# Altium PCB MAGIsCM4Core-AutoRoute.PcbDoc
Units mil, origin at the board's own origin, x right, y up, seen from the top; angles counter-clockwise.
Board outline 6000 x 4000 mil, 4 copper layers (Component Side, Ground Plane, Power Plane, Solder Side), stack 33.234 mil thick; 33 components, 65 nets, 187 pads, 103 vias.
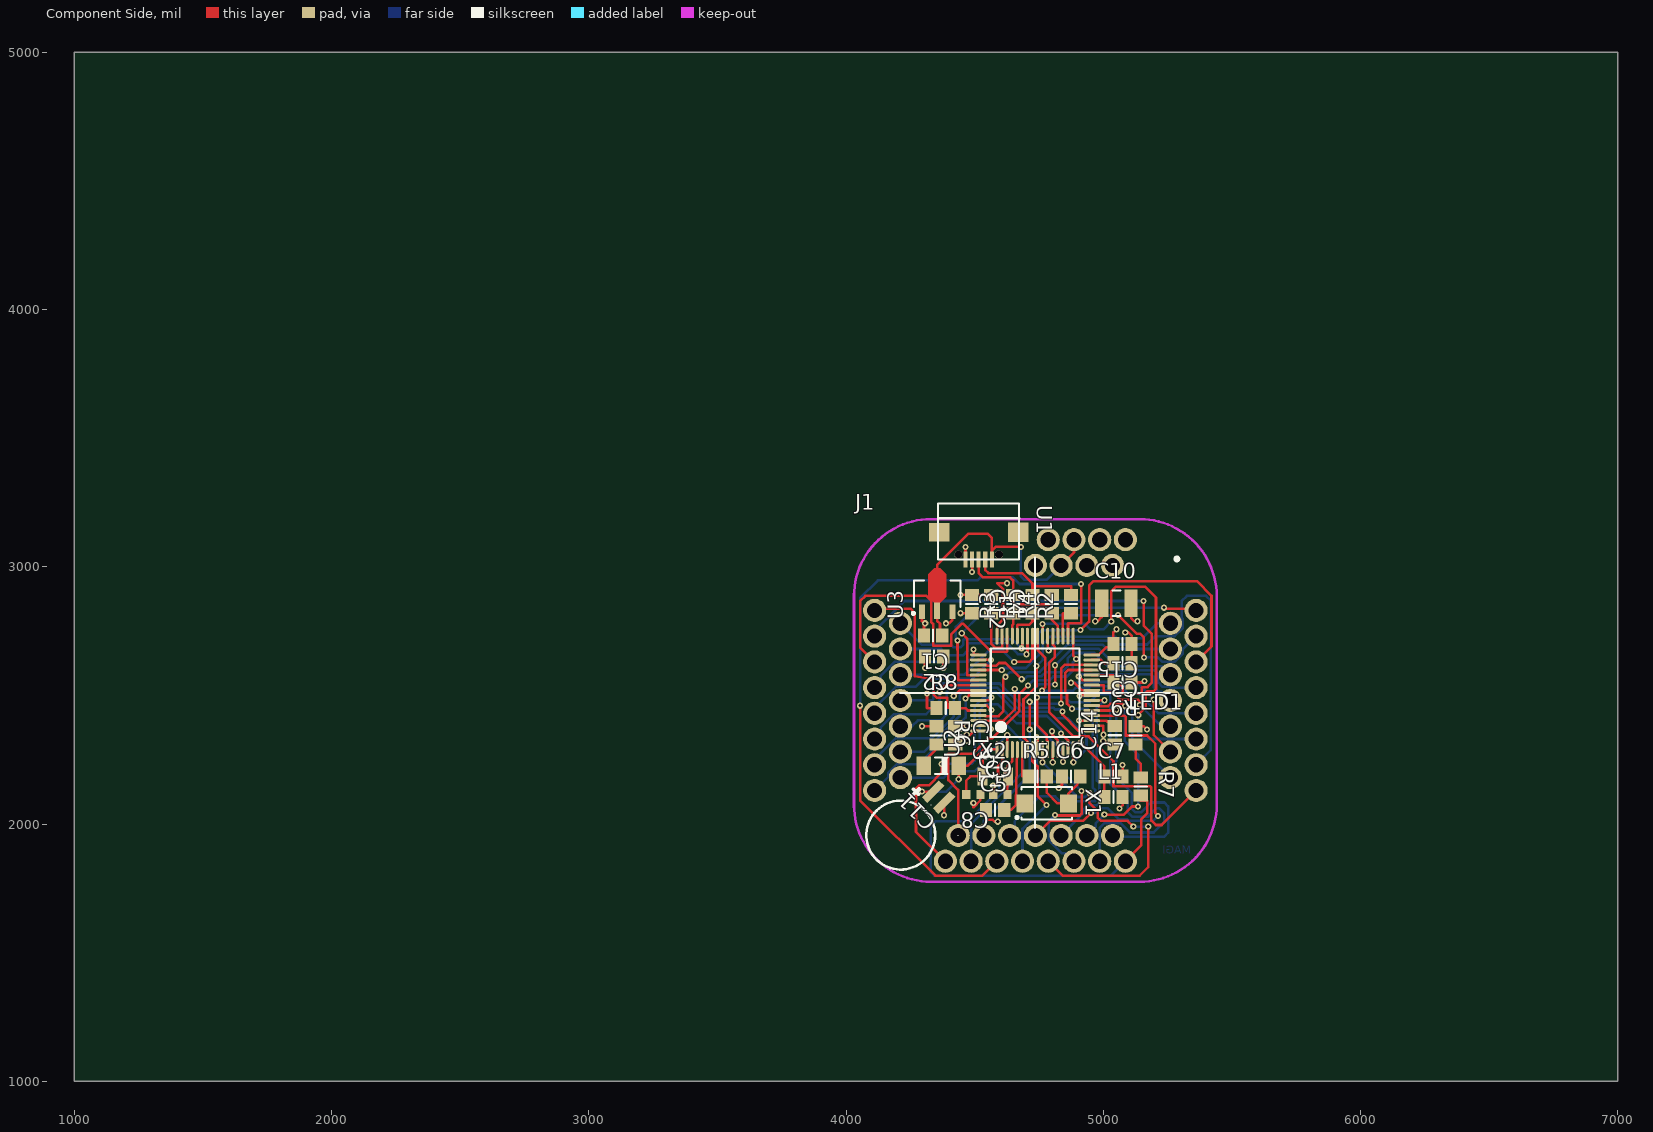
[diagram p0: Component Side view]
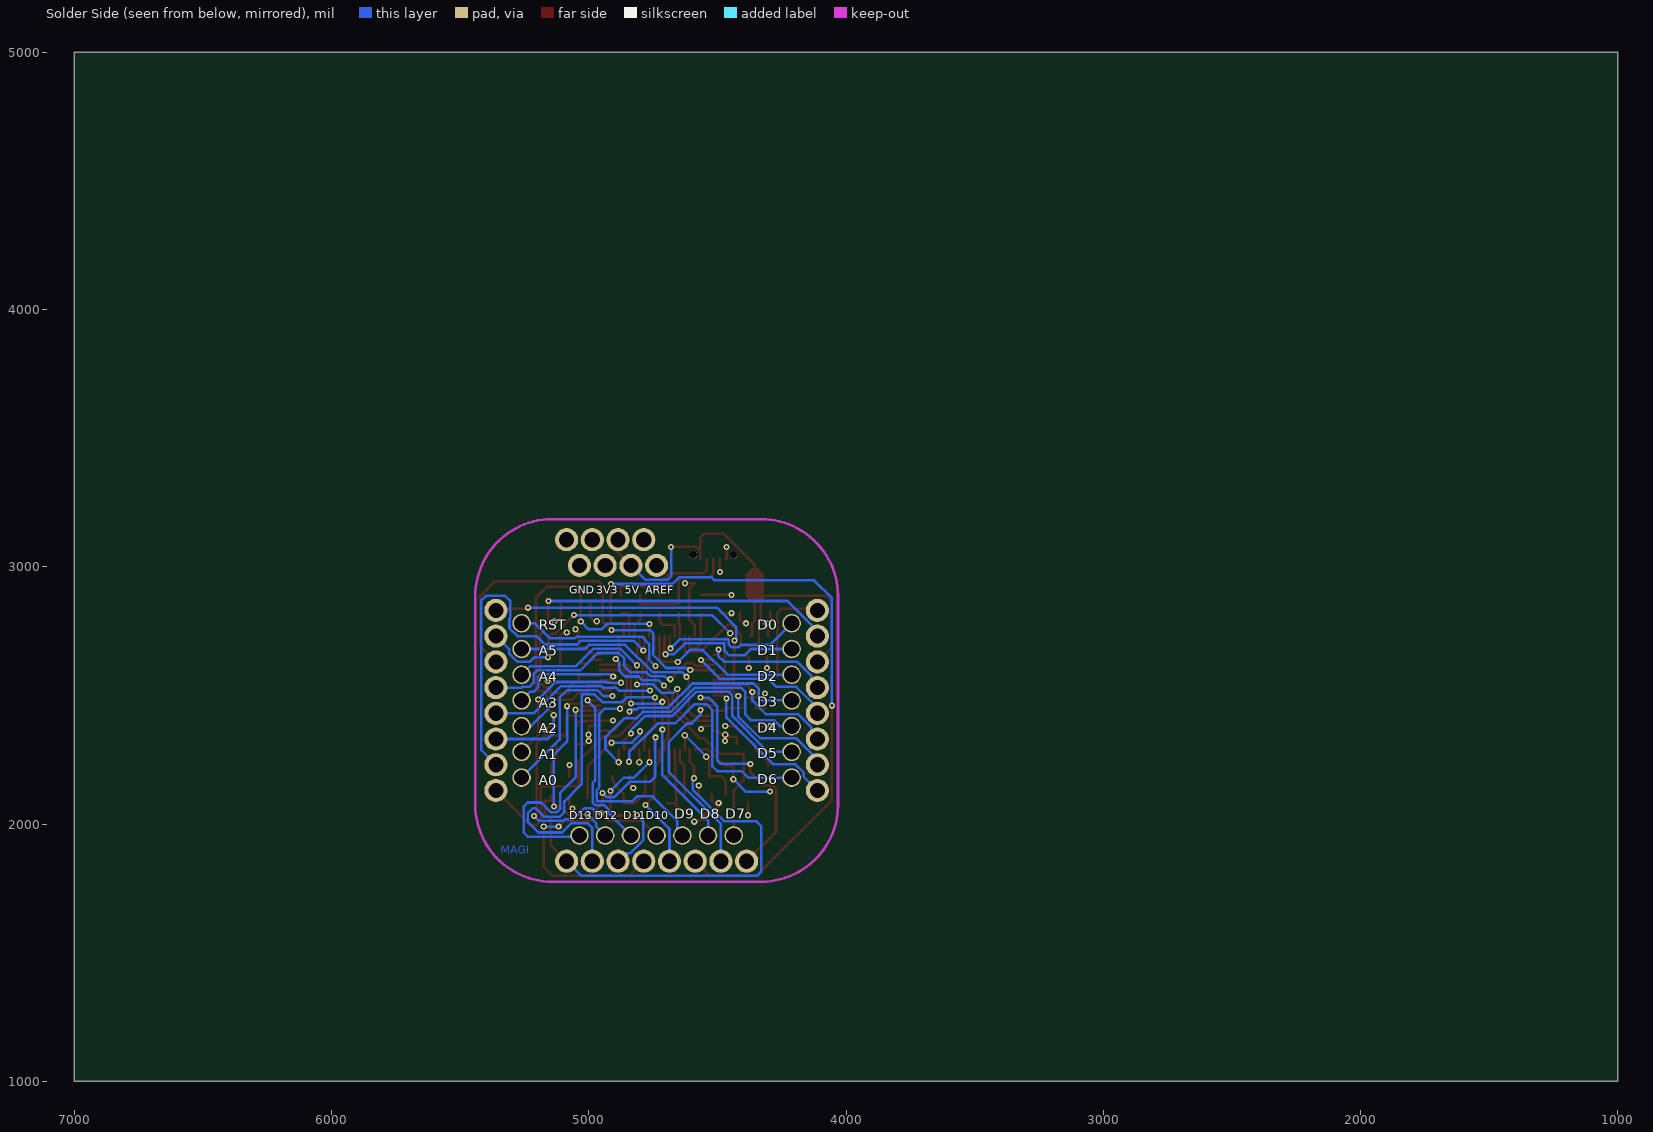
[diagram p1: Solder Side view, seen from below]
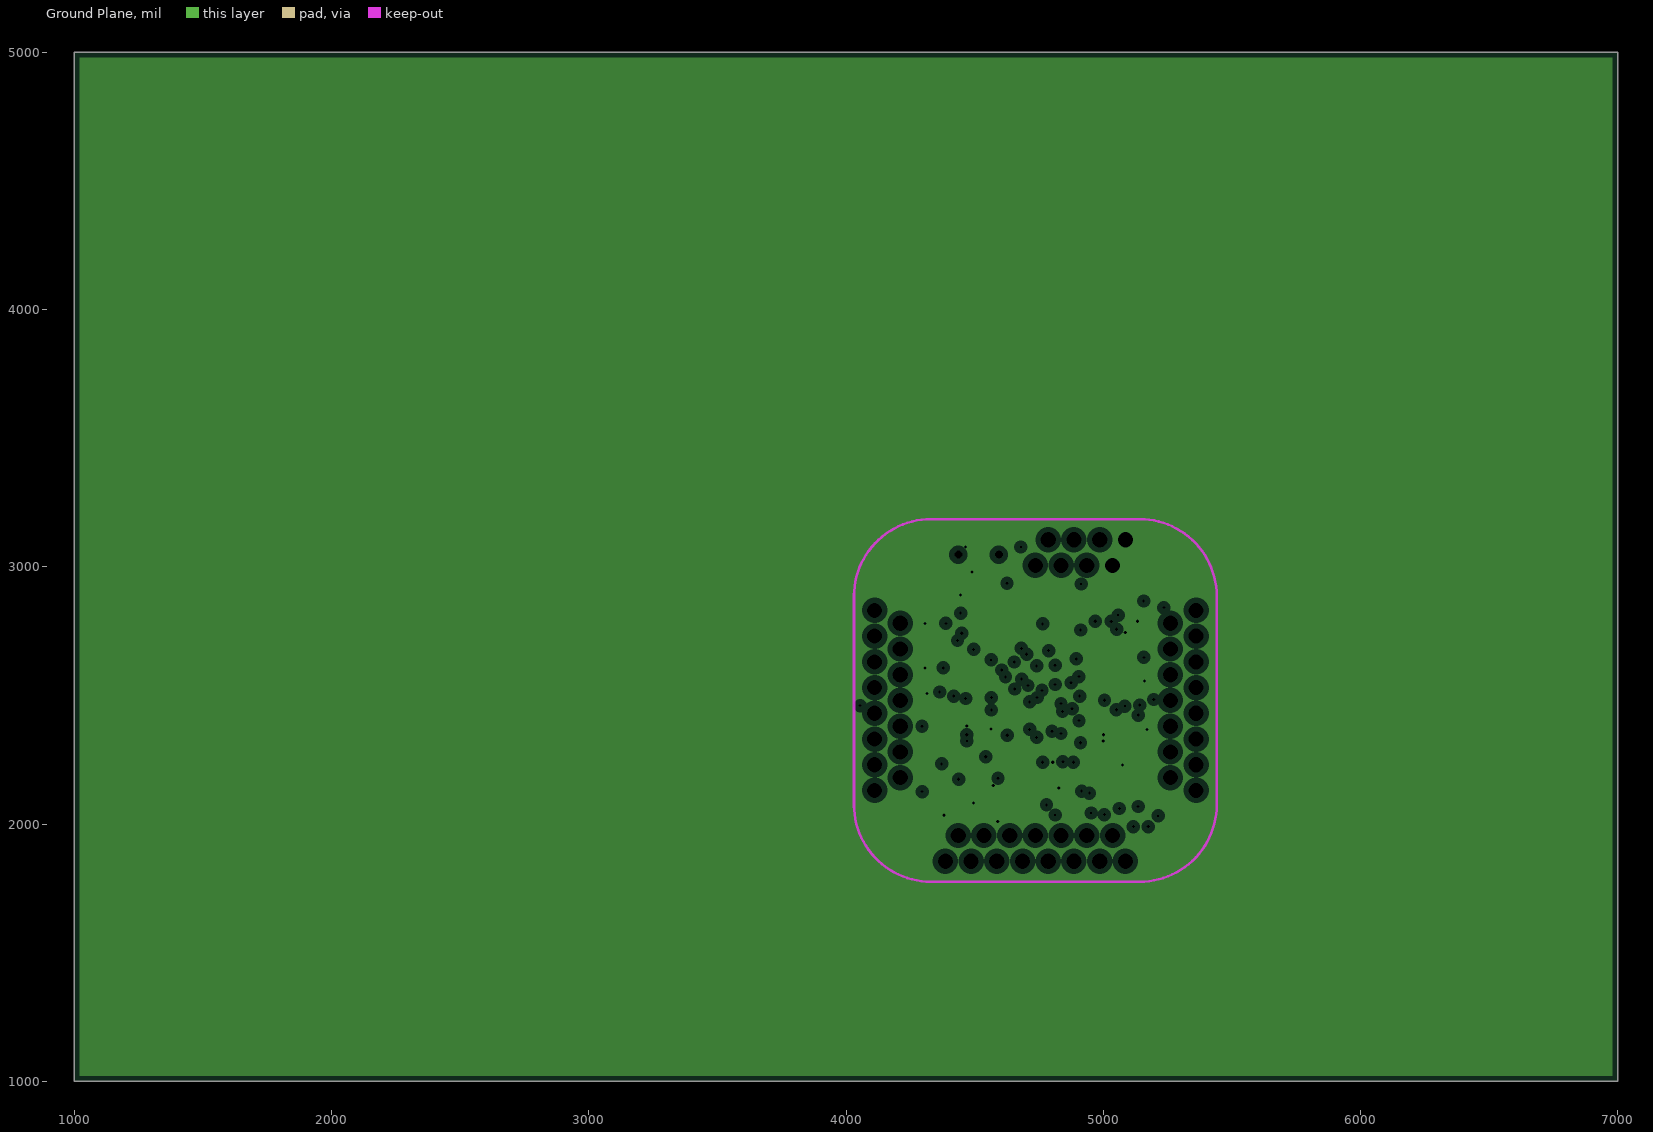
[diagram p2: Ground Plane, clearances drawn from the general rule]
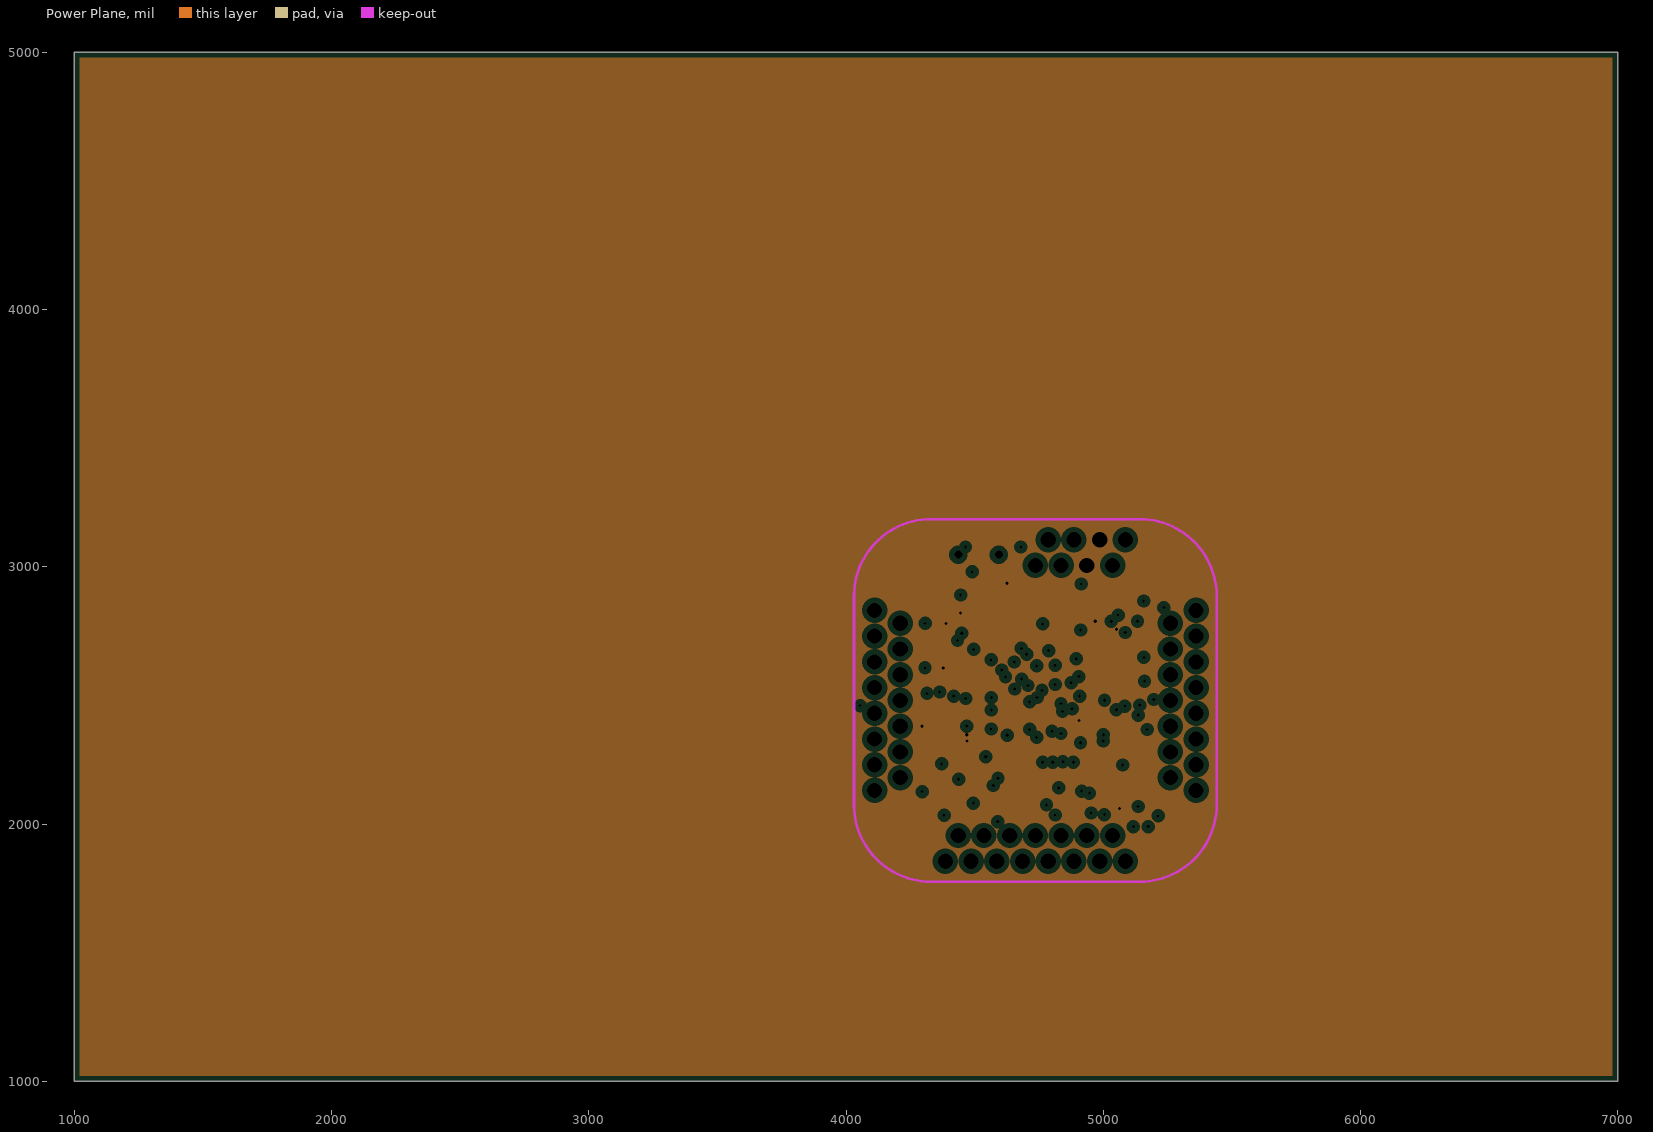
[diagram p3: Power Plane, clearances drawn from the general rule]

## Layer stack, top to bottom
Top Solder: solder mask 0.4, Solder Resist, Dk 3.5
Component Side: signal copper 1.4
Dielectric 1: core 12.6, FR-4, Dk 4.8
Ground Plane: plane copper 1.417, net GND
Dielectric 3: prepreg 5, Dk 4.2
Power Plane: plane copper 1.417, net 3.3V
Dielectric 4: core 10, Dk 4.2
Solder Side: signal copper 1.4
Bottom Solder: solder mask 0.4, Solder Resist, Dk 3.5

## Board outline
1000,1000 7000,1000 7000,5000 1000,5000

## Design rules (kind name [scope] priority, off if disabled: settings)
Clearance [All] p1: gap=6
PlaneClearance [All] p1: clearance=20
PlaneConnect [All] p1: planeconnectstyle=Relief reliefexpansion=20 reliefentries=4 reliefconductorwidth=10 reliefairgap=10
PolygonConnect [All] p1: connectstyle=Relief reliefconductorwidth=10 reliefentries=4 polygonreliefangle="90 Angle" airgapwidth=10
RoutingVias [All] p1: holewidth=12 width=24 viastyle="Through Hole" minholewidth=12 minwidth=24 maxholewidth=280 maxwidth=500
SolderMaskExpansion [All] p1: expansion=4
Width [All] p1: maxlimit=100 minlimit=6 preferedwidth=10
27 further rules are at their usual default settings.

## Components (designator, comment, footprint, x,y, rotation, side; value= is the part's Value field where it differs from the comment)
C1 "10uf" 6-0805_n 4338.58,2732.28 r180 top
C2 "10uf" 6-0805_n 4342.52,2651.57 r180 top
C3 "CAP" 6-0805_N 5075,2625 r180 top
C4 "CAP" 6-0805_N 4565,2855 r270 top
C5 "15PF" 6-0805_n 4580,2055 r0 top
C6 "15PF" 6-0805_n 4875,2185 r0 top
C7 "CAP" 6-0805_N 5040,2185 r0 top
C8 "15PF" 1608[0603] 4495,2115 r180 top
C9 "15PF" 1608[0603] 4600,2115 r0 top
C10 "10uf" C1210_N 5051.18,2858.27 r0 top
C11 "10uf" 3.3V0.2F-RK 4360.24,2104.33 r135 top
C12 "CAP" 6-0805_N 4490,2855 r270 top
C13 "CAP" 6-0805_N 4425,2345 r270 top
C14 "CAP" 6-0805_N 5045,2345 r90 top
C15 "CAP" 6-0805_N 5075,2700 r180 top
D1 "SOD123" LL34 4370.08,2226.38 r0 top
J1 "MAGIsBoard-2x" MAGIsBoard-2x 4736.22,2480.32 r0 top
L1 "INDUCTOR" 6-0805_n 5040,2105 r0 top
LED1 "LED_3" 6-0805_N 5125.98,2344.49 r90 top
R1 "10K" 6-0805_n 4725,2855 r90 top
R2 "10K" 6-0805_n 4875,2854.57 r90 top
R3 "10K" 6-0805_n 4650,2855 r90 top
R4 "10K" 6-0805_n 4800,2854.57 r90 top
R5 "10K" 6-0805_n 4745,2185 r0 top
R6 "10K" 6-0805_n 4352.36,2344.49 r270 top
R7 "RES1_1" 6-0805_N 5145.67,2145.67 r270 top
R8 "RES1_1" 6-0805_N 4387.8,2450.79 r0 top
R9 "RES1_1" 6-0805_N 5075,2550 r180 top
U1 "USB" microUSB 4515.75,3051.18 r0 top
U2 "STM32F415RG" STM32F415RG 4735,2510 r90 top
U3 "HS7333" HS7333 4354.33,2895.67 r90 top
X1 "8M" 5032 4790,2080 r270 top
X2 "32.768k" 3215 4580,2185 r0 top

## Footprints (in the part's own frame and the unit in brackets; to place one, negate y for a bottom-side part, rotate by r counter-clockwise, add the part's x,y. Pads: shape width x height; smd on the part's side, far side on the other; paste and mask are expansions set on the pad)
3.3V0.2F-RK [mm]
  rect 0.8x2.4 smd: 1(0.762,0) 2(-0.762,0)
  silkscreen extent -3.4,0.8 3.4,8.7
6-0805_n [mm] "Chip Resistor, Body 2.0x1.2mm, IPC Medium Density"
  rect 1.2x1.4 smd: 1(-0.9,0) 2(0.9,0)
  silkscreen extent 0,-0.6 0,0.6, body extent -1.07,-0.7 1.07,0.7, height 0.7
6-0805_N [mm] "Chip Resistor, Body 2.0x1.2mm, IPC Medium Density"
  rect 1.2x1.4 smd: 1(-0.9,0) 2(0.9,0)
  silkscreen extent 0,-0.6 0,0.6, body extent -1.07,-0.7 1.07,0.7, height 0.7
1608[0603] [mm] "Chip Capacitor, Body 1.6x0.8mm, IPC High Density"
  rect 0.8x0.9 smd: 1(-0.7,0) 2(0.7,0)
  body extent -0.87,-0.48 0.87,0.48, height 1.3
3215 [mm]
  rect 1x1.8 smd: 1(-1.25,0) 2(1.25,0)
  silkscreen extent -0.45,-0.9 0.45,0.9
5032 [mm]
  rect 1.8x1.7 smd: 1(0,-2.404) 2(0,1.896)
  silkscreen extent -1.6,-3.3 1.6,2.25
C1210_N [mm] "Chip Capacitor, Body 3.2x2.5mm, IPC Medium Density"
  rect 1.3x2.7 smd: 1(-1.45,0) 2(1.45,0)
  silkscreen extent -0.4,-1.25 0.4,1.25, body extent -1.7,-1.35 1.7,1.35, height 1.5
HS7333 [mm] "SOT89, 3-Leads, Body 4.50x2.50mm, Pitch 1.50mm, Lead Span 4.1mm, IPC Medium Density"
  rect 1.4x0.6 smd: 1(-1.8,1.5) 3(-1.8,-1.5)
  rect 1.6x0.6 smd: 2(-1.7,0)
  Component Side region: -0.9,0.3 -0.3,0.9 1.9,0.9 2.5,0.3 2.5,-0.3 1.9,-0.9 -0.3,-0.9 -0.9,-0.3
  silkscreen extent -2.07,-2.3 1.3,2.47, body extent -1.3,-2.3 1.3,2.3, height 1.6
LL34 [mm] "MELF Diode, 2-Leads, Body 3.50x1.50mm, IPC Low Density"
  rect 1.45x1.8 smd: 1(-1.725,0) 2(1.725,0)
  silkscreen extent -0.6,-0.8 0.6,0.8, body extent -1.85,-0.77 1.85,0.77, height 1.53
MAGIsBoard-2x [mil]
  round 90 hole 59.06: 1(300,525) 1(350,625) 2(200,525) 2(250,625) 3(100,525) 3(150,625) 4(0,525) 4(50,625) 29(-625,350) 30(-625,250) 31(-625,150) 32(-625,50) 33(-625,-50) 34(-625,-150) 35(-625,-250) 36(-625,-350) 37(-350,-625) 38(-250,-625) 39(-150,-625) 40(-50,-625) 41(50,-625) 42(150,-625) 43(250,-625) 44(350,-625) 45(625,-350) 46(625,-250) 47(625,-150) 48(625,-50) 49(625,50) 50(625,150) 51(625,250) 52(625,350)
  round 90 / inner round 72 / far side round 72 hole 59.06: 8(-525,300) 9(-525,200) 10(-525,100) 11(-525,0) 12(-525,-100) 13(-525,-200) 14(-525,-300) 15(-300,-525) 16(-200,-525) 17(-100,-525) 18(0,-525) 19(100,-525) 20(200,-525) 21(300,-525) 22(525,-300) 23(525,-200) 24(525,-100) 25(525,0) 26(525,100) 27(525,200) 28(525,300)
  Keep-Out Layer lines w10: -705,-415 -705,415 ; -705,-405 ccw(c-405,-405) -405,-705 ; -705,405 cw(c-405,405) -405,705 ; -425,705 425,705 ; -410,-705 415,-705 ; 405,-705 ccw(c405,-405) 705,-405 ; 405,705 cw(c405,405) 705,405 ; 705,-425 705,430
  silkscreen extent 543,543 557,557
microUSB [mm]
  round 0.8 hole 0.8: 0(-2,-0.1) 0(2,-0.1)
  rect 0.4x1.6 smd: 1(1.3,-0.575) 2(0.65,-0.575) 3(0,-0.575) 4(-0.65,-0.575) 5(-1.3,-0.575)
  rect 2x1.8 smd: 6(-3.9,2.099)
  rect 2x1.9 smd: 7(3.9,2.099)
  silkscreen extent -4,-0.58 4,4.92, body extent -4.1,-0.68 4.1,5.02, height 3
STM32F415RG [mm] "TSQFP, 64-Leads, Body 10.00x10.00mm, Pitch 0.50mm, IPC Medium Density"
  oval 1.65x0.3 smd: 1(-5.6,3.75) 2(-5.6,3.25) 3(-5.6,2.75) 4(-5.6,2.25) 5(-5.6,1.75) 6(-5.6,1.25) 7(-5.6,0.75) 8(-5.6,0.25) 9(-5.6,-0.25) 10(-5.6,-0.75) 11(-5.6,-1.25) 12(-5.6,-1.75) 13(-5.6,-2.25) 14(-5.6,-2.75) 15(-5.6,-3.25) 16(-5.6,-3.75) 33(5.6,-3.75) 34(5.6,-3.25) 35(5.6,-2.75) 36(5.6,-2.25) 37(5.6,-1.75) 38(5.6,-1.25) 39(5.6,-0.75) 40(5.6,-0.25) 41(5.6,0.25) 42(5.6,0.75) 43(5.6,1.25) 44(5.6,1.75) 45(5.6,2.25) 46(5.6,2.75) 47(5.6,3.25) 48(5.6,3.75)
  oval 0.3x1.65 smd: 17(-3.75,-5.6) 18(-3.25,-5.6) 19(-2.75,-5.6) 20(-2.25,-5.6) 21(-1.75,-5.6) 22(-1.25,-5.6) 23(-0.75,-5.6) 24(-0.25,-5.6) 25(0.25,-5.6) 26(0.75,-5.6) 27(1.25,-5.6) 28(1.75,-5.6) 29(2.25,-5.6) 30(2.75,-5.6) 31(3.25,-5.6) 32(3.75,-5.6) 49(3.75,5.6) 50(3.25,5.6) 51(2.75,5.6) 52(2.25,5.6) 53(1.75,5.6) 54(1.25,5.6) 55(0.75,5.6) 56(0.25,5.6) 57(-0.25,5.6) 58(-0.75,5.6) 59(-1.25,5.6) 60(-1.75,5.6) 61(-2.25,5.6) 62(-2.75,5.6) 63(-3.25,5.6) 64(-3.75,5.6)
  silkscreen extent -5.72,-4.37 4.37,4.57, body extent -5,-5 5,5, height 1.6

## Part data
C1 C2 C10 C11: library part "CAPACITOR POL", "Capacitor"
C3 C4 C7 C12 C13 C14 C15: library part CAP_1, "Capacitor"
C5 C6 C8 C9: library part CAP
D1: library part "DIODE SCHOTTKY_1", "Schottky Diode"
R1 R2 R3 R4 R5 R6: library part RES
X1 X2: library part CRYSTAL

## Via types
v1: diameter 24, hole 12, Component Side to Solder Side, 103 vias

## Nets (pads, with @x,y where several pads share a name; then routed paths per layer and width w, separated by ;. In a path a pad name is that pad's centre, name@x,y a point inside that pad or via, vN(x,y) a via of type N, cw(c..) or ccw(c..) an arc to the next point about the centre after c; other vN are vias at no path point)
3.3V: C2.1 C10.1 C12.2 C13.2 C14.2 C15.2 J1.2 L1.2 R6.1 U2.19 U2.32 U2.48 U2.64 U3.3 | length 1084.8
  Component Side w10: v1(4295.3,2379.92) R6.1 ; v1(4377.95,2607.01) C2.1 ; v1(4388.39,2780.24) 4400,2780.24 4413.39,2793.63 U3.3 ; C13.2 4425,2338.5 4426,2339.5 4468.06,2339.5 4469.56,2341 v1(4469.56,2347.07) ; v1(4445.44,2819.57) C12.2 ; v1(4470,2322.5) 4470,2334 4498.36,2362.36 U2.64 ; U2.48 4587.36,2771.44 4610.36,2794.44 4610.36,2912.97 4587.36,2935.97 v1(4626,2935.97) ; v1(4905.99,2401.73) U2.19 5012.27,2401.73 5016,2398 5045,2398 C14.2 ; U2.32 4982,2657.64 5011,2686.64 5039.57,2686.64 C15.2 5039.57,2744.56 v1(5052.07,2757.06) ; v1(4969.09,2788.12) 4978.1,2788.12 4994.09,2804.12 C10.1 ; v1(5062.93,2060.44) 5075.43,2072.94 L1.2
5V: C1.1 J1.3 U1.1 U3.2 | length 1180.9
  Component Side w10: C1.1 4365.39,2732.28 4365.39,2778.63 4354.33,2789.69 U3.2 4354.33,3006.33 4477,3129 4550.43,3129 4566.93,3112.5 4566.93,3062.5 ; U1.1 4566.93,3062.5 ; v1(4680,3077) 4581.43,3077 4566.93,3062.5 ; J1.3@4836.22,3005.32 4886.22,3055.32 J1.3@4886.22,3105.32
  Solder Side w10: v1(4680,3077) 4680,2962.5 4693.5,2949 4779.9,2949 J1.3@4836.22,3005.32
BOOT0: J1.29 R8.2 U2.60 | length 759.8
  Component Side w10: J1.29 4111.22,2837 4250,2837 4268,2819 4268,2575 4326.5,2564.5 4341,2550 4341,2503.5 4354.5,2490 4393,2490 4396,2451.79 R8.2 4464,2450.79 4473.69,2441.1 U2.60
GND: C1.2 C2.2 C3.1 C4.1 C5.1 C6.1 C7.2 C8.1 C9.1 C10.2 C11.2 C12.1 C13.1 C14.1 C15.1 J1.1 LED1.2 R8.1 R9.1 U1.4 U1.5 U2.12 U2.18 U2.63 U3.1 | length 1464.8
  Component Side w10: U3.1 4295.28,2792.74 ; C1.2 4303.15,2780.85 4295.28,2788.72 4295.28,2792.74 ; v1(4307.09,2607.01) C2.2 ; v1(4307.78,2780.24) 4295.28,2792.74 ; v1(4314.86,2507.85) 4314.86,2451.93 4316,2450.79 R8.1 ; v1(4381.45,2034.07) C11.2 ; C13.1 v1(4469.56,2380.43) ; v1(4445.44,2890.43) C12.1 C4.1 ; U1.5 v1(4464.57,3077.02) ; v1(4490.16,2980.03) U1.4 ; v1(4495,2081.27) 4495,2064.75 4522.56,2092.31 C8.1 ; U2.63 4551.51,2382.05 v1(4564.01,2369.55) ; C5.1 4544.57,2017 4545.57,2016 4570.5,2016 4577.5,2009 v1(4590,2009) ; C9.1 v1(4572.44,2149.72) ; v1(4803.9,2240.05) U2.12 ; v1(4827.07,2140.44) 4839.57,2152.94 C6.1 ; U2.18 4999,2382.05 5000,2381.05 v1(5000,2322.5) ; v1(5000.44,2347.07) 5000.44,2325 5015.87,2309.57 C14.1 ; C7.2 v1(5075.43,2229.56) ; v1(5085.43,2744.56) 5097.93,2744.56 5110.43,2732.06 C15.1 5111,2700 5111,2625 C3.1 ; C10.2 5108.27,2800.62 5120.77,2788.12 v1(5133.27,2788.12) ; R9.1 5154.99,2550 v1(5160.43,2555.44) ; LED1.2 5158.04,2379.92 v1(5170.54,2367.42)
NetC3_2: C3.2 U2.31 | length 89.5
  Component Side w10: U2.31 4991,2637.95 5003.95,2625 C3.2
NetC4_2: C4.2 U2.47 | length 211.3
  Component Side w10: C4.2 4565,2700 4579,2686 4606.05,2686 4607.05,2687 U2.47
NetC6_2: C6.2 R5.2 X1.2 | length 285.8
  Component Side w10: R5.2 4780.43,2122.07 4822.5,2080 X1.2 4864.65,2118.19 4899.45,2153 C6.2
NetC7_1: C7.1 L1.1 U2.13 | length 466.2
  Component Side w10: v1(4800.96,2360.46) 4800.96,2347.96 4823.58,2325.34 U2.13 ; v1(4911.57,2316) 5004.57,2223 C7.1 L1.1
  Solder Side w10: v1(4800.96,2360.46) 4800.96,2347.96 4832.92,2316 v1(4911.57,2316)
NetD1_1: D1.1 R6.2 | length 103.5
  Component Side w10: D1.1 4302.17,2242 4352.36,2292.2 R6.2
NetLED1_1: LED1.1 R7.1 | length 136.1
  Component Side w10: LED1.1 5125.98,2254.69 5145.67,2235 R7.1
NRST: J1.28 U2.7 | length 983.4
  Component Side w10: U2.7 4705.47,2320.53 4690,2336 4690,2484.5 4741,2535.5 v1(4741,2614.5)
  Solder Side w10: v1(4741,2614.5) 4765,2638.5 4765,2700 4793.76,2728.76 5045.66,2728.76 5052.86,2721.56 5150.86,2721.56 5209.61,2780.32 J1.28
OSC32_IN: C8.2 U2.3 X2.1 | length 378.9
  Component Side w10: C8.2 4467.44,2168.44 4484,2185 X2.1 4530.79,2249.06 v1(4543.29,2261.56) ; U2.3 v1(4626.73,2345)
  Solder Side w10: v1(4543.29,2261.56) v1(4626.73,2345)
OSC32_OUT: C9.2 U2.4 X2.2 | length 182.3
  Component Side w10: C9.2 4627.56,2147.68 4629.21,2149.33 X2.2 4629.21,2228 4646.42,2245.21 U2.4
OSC_IN: C5.2 U2.5 X1.1 | length 306.8
  Component Side w10: C5.2 4642,2055 4660.1,2073.1 ; U2.5 4660.32,2080.97 4660.1,2073.1 ; X1.1 4667,2080 4660.1,2073.1
OSC_OUT: R5.1 U2.6 | length 128.3
  Component Side w10: U2.6 4685.79,2185 R5.1
PA0: J1.14 U2.14 | length 1040.2
  Component Side w10: v1(4843.27,2242) U2.14
  Solder Side w10: J1.14 4380.32,2180.32 4405,2205 4500,2205 4520,2225 4520,2443 4543,2466 4589.24,2466 4663.74,2391.5 4731.01,2391.5 4843.27,2279.24 v1(4843.27,2242)
PA1: J1.13 U2.15 | length 917.6
  Component Side w10: v1(4836,2352) 4862.95,2325.05 U2.15
  Solder Side w10: J1.13 4303.32,2280.32 4442,2419 4442,2500 4456.26,2514.26 4580.36,2514.26 4674.64,2419.99 4781,2419.99 4836,2364.99 v1(4836,2352)
PA2: J1.12 U2.16 | length 1086
  Component Side w10: U2.16 4882.64,2241 v1(4883.64,2240)
  Solder Side w10: J1.12 4257.32,2380.32 4280,2403 4369,2403 4391,2425 4391,2512.5 4408.76,2530.26 4586.99,2530.26 4681.26,2436 4790,2436 4814.41,2411.59 4861.41,2411.59 4935,2338 4935,2291.36 v1(4883.64,2240)
PA3: J1.11 U2.17 | length 878.5
  Component Side w10: v1(4841.69,2437.81) 4841.69,2425.31 4904.64,2362.36 U2.17
  Solder Side w10: J1.11 4334.32,2480.32 4339,2485 4339,2525 4360.26,2546.26 4596.9,2546.26 4691.16,2452 4806,2452 4813,2445 4834.5,2445 v1(4841.69,2437.81)
PA4: J1.18 U2.20 | length 1169.6
  Component Side w10: J1.18 4792.9,2012 4921.9,2012 v1(4952.9,2043) ; U2.20 5028,2421.42 5028.42,2421 5083.42,2421 5087,2417.42 5087,2345 5088,2344 5171,2344 5203,2312 5203,2042 v1(5213.5,2031.5)
  Solder Side w10: v1(4952.9,2043) 4967.95,2043 4987,2062.05 5016.95,2062.05 5060.68,2018.32 5093.9,2018.32 5099.22,2013 5195,2013 v1(5213.5,2031.5)
PA5: J1.21 U2.21 | length 1005.6
  Component Side w10: U2.21 5048.1,2441.1 v1(5051,2444)
  Solder Side w10: J1.21 5058.3,1955.32 5058.3,1951 5237.5,1951 5252.5,1966 5252.5,2068.69 5237.5,2083.69 5184.69,2083.69 5146,2045 5125,2045 5111,2059 5111,2121 5051,2181 v1(5051,2444)
PA6: J1.20 U2.22 | length 804
  Component Side w10: U2.22 4982,2460.79 4982,2458.01 4998.99,2458.01 5018.58,2458 5028,2467.42 5074.58,2467.42 v1(5084,2458) ; v1(5004.28,2036.31) 5080.31,2036.31 5112,2068 v1(5135.5,2068)
  Solder Side w10: J1.20 4970.99,1990.09 4970.99,2003.03 v1(5004.28,2036.31) ; v1(5084,2458) 5084,2321 5135.5,2269.5 v1(5135.5,2068)
PA7: J1.19 U2.23 | length 673.5
  Component Side w10: U2.23 5004.47,2480.47 v1(5005,2481)
  Solder Side w10: J1.19 4923.96,2043.06 4923.96,2056 4940.96,2073 4975.08,2073 4985,2082.92 4985,2158.68 4975.08,2168.6 4975.08,2451.08 v1(5005,2481)
PA8: J1.10 U2.41 | length 666.5
  Component Side w10: v1(4654,2630) 4712.5,2630 4725.16,2642.66 U2.41
  Solder Side w10: J1.10 4285.57,2580.32 4285.75,2580.5 4461.44,2580.5 4557.94,2677 4607,2677 v1(4654,2630)
PA9: J1.9 U2.42 | length 625.7
  Component Side w10: v1(4702,2660) 4705.47,2663.47 U2.42
  Solder Side w10: J1.9 4369.68,2680.32 4394.5,2655.5 4454.36,2655.5 4472.5,2673.64 4472.5,2701 4473.5,2702 4626,2702 4668,2660 v1(4702,2660)
PA10: J1.8 U2.43 | length 597
  Component Side w10: v1(4682,2683) 4685.79,2686.79 U2.43
  Solder Side w10: J1.8 4295.04,2696.5 4408.86,2696.5 4417.86,2687.5 4446.86,2687.5 4456.5,2697.14 4456.5,2717 4457.5,2718 4647,2718 v1(4682,2683)
PA11: R1.1 U2.44 | length 139.5
  Component Side w10: U2.44 4666.1,2773 4668.1,2775 4712.5,2775 4725,2787.5 R1.1
PA12: R3.1 U2.45 | length 90.6
  Component Side w10: U2.45 4646.42,2773 4650,2776.58 R3.1
PA13: J1.31 U2.46 | length 1184
  Component Side w10: J1.31 4055,2686.54 4055,2867 4075,2887 4312.5,2887 4331,2868.5 4331,2786 4339,2778 4339,2694 4340,2693 4407.64,2693 4408.64,2694 4408.64,2737.5 4450.14,2779 4454,2779 4563,2670 4625.73,2670 4626.73,2671 U2.46
PA14: J1.32 U2.49 | length 528.2
  Component Side w10: v1(4496,2679) 4496,2657.64 U2.49
  Solder Side w10: J1.32 4135,2530.32 4135,2574.9 4191.1,2631 4475,2631 4496,2652 v1(4496,2679)
PA15: J1.33 U2.50 | length 600.5
  Component Side w10: U2.50 v1(4564,2638) v1(4564,2638)
  Solder Side w10: J1.33 4111.22,2451.12 4193.42,2533.32 4270.57,2533.32 4301.75,2564.5 4490.5,2564.5 v1(4564,2638)
PB0: J1.24 U2.26 | length 395.4
  Component Side w10: U2.26 5001,2539.53 5002,2538.53 5002,2512 5003,2511 5037.5,2511 5065.08,2483.42 5134.58,2483.42 5142,2476 v1(5142,2462)
  Solder Side w10: v1(5142,2462) 5223.68,2380.32 J1.24
PB1: J1.25 U2.27 | length 481.5
  Component Side w10: v1(4905,2573) 4918.79,2559.21 U2.27
  Solder Side w10: v1(4905,2573) 4913.76,2581.76 5185.71,2581.76 5195.79,2571.68 5195.79,2531.6 5212.5,2514.89 5226.65,2514.89 J1.25
PB2: J1.30 R9.2 U2.28 | length 1765.5
  Component Side w10: U2.28 5039,2578.9 5039.57,2578.33 R9.2 5058,2550 5075.81,2532.19 5075.81,2510 5076.81,2509 5148,2509 5149,2510 5149,2528.57 5152.87,2532.44 5172.44,2532.44 5189.22,2549.22 5189.22,2739 5157,2771.22 v1(5157,2867)
  Solder Side w10: J1.30 4111.22,2751.12 4227.1,2867 v1(5157,2867)
PB3: J1.34 U2.55 | length 537.8
  Component Side w10: v1(4364.13,2513) 4364.13,2516.66 4387,2539.53 U2.55
  Solder Side w10: J1.34 4135,2330.32 4135,2374.9 4187.42,2427.32 4311.95,2427.32 4364.13,2479.5 v1(4364.13,2513)
PB4: J1.35 U2.56 | length 581.3
  Component Side w10: v1(4419,2497) 4441.84,2519.84 U2.56
  Solder Side w10: J1.35 4111.22,2251 4193.22,2333 4333.37,2333 4419,2418.63 v1(4419,2497)
PB5: J1.36 U2.57 | length 609.4
  Component Side w10: v1(4465,2487.66) 4477.5,2500.16 U2.57
  Solder Side w10: J1.36 4164.22,2183.32 4164.22,2199.79 4197.43,2233 4284.13,2233 4465,2413.87 v1(4465,2487.66)
PB6: J1.37 U2.58 | length 966.6
  Component Side w10: v1(4372,2233.78) 4372,2200 4322,2150 4284.5,2150 4272,2137.5 4272,1969.54 J1.37 ; U2.58 4554.21,2480.47 v1(4565,2491.26)
  Solder Side w10: v1(4372,2233.78) 4487.5,2233.78 4500,2246.28 4500,2456 4535.26,2491.26 v1(4565,2491.26)
PB7: J1.38 U2.59 | length 791
  Component Side w10: U2.59 4547.21,2460.79 v1(4565,2443)
  Solder Side w10: J1.38 4486.22,1999.22 4689,2202 4689,2319 4617.31,2390.69 4600,2390.69 4565,2425.69 v1(4565,2443)
PB8: J1.27 U2.61 | length 943.9
  Component Side w10: U2.61 4542,2421.42 4542,2419.5 4593,2419.5 4611,2437.5 4611,2563.14 v1(4620,2572.14)
  Solder Side w10: v1(4620,2572.14) 4638.39,2590.52 4753.02,2590.52 4859.26,2696.76 4998.89,2696.76 5015.34,2680.32 J1.27
PB9: J1.26 U2.62 | length 1005.8
  Component Side w10: U2.62 4612.5,2401.73 4656,2445.23 v1(4656,2525) ; v1(4813,2542.52) v1(4813,2617)
  Solder Side w10: v1(4656,2525) 4670,2511 4718.48,2511 4750,2542.52 v1(4813,2542.52) ; v1(4813,2617) 4876.76,2680.76 4982.89,2680.76 5049.66,2614 5227.54,2614 J1.26
PB10: J1.17 U2.29 | length 1113.7
  Component Side w10: v1(4879,2448) 4859,2468 4859,2504.5 4852,2511.5 4852,2587 4863.58,2598.58 U2.29
  Solder Side w10: J1.17 4656,1975.1 4656,2011 4752.11,2107.11 4812.39,2107.11 4830.5,2089 4967.94,2089 4969,2090.06 4969,2132.68 4959,2142.68 4959,2428.37 4939.37,2448 v1(4879,2448)
PB11: J1.16 U2.30 | length 979.8
  Component Side w10: v1(4714,2368) v1(4714,2475) ; v1(4836,2468) 4836,2604.27 4850,2618.27 U2.30
  Solder Side w10: J1.16 4536.22,2013.22 4714,2191 v1(4714,2368) ; v1(4714,2475) 4721,2468 v1(4836,2468)
PB12: J1.15 U2.33 | length 1133.9
  Component Side w10: J1.15 4436.22,2132.78 4398,2171 4398,2272 4399,2273 4492,2273 4553.05,2334.05 4569.05,2334.05 4674,2439 4674,2504.94 v1(4707.55,2538.5) ; U2.33 4882.64,2654.26 v1(4895.14,2641.76)
  Solder Side w10: v1(4707.55,2538.5) 4727.58,2558.52 4791.54,2558.52 4806.3,2573.29 4858.39,2573.29 4881.89,2596.78 4881.89,2628.51 v1(4895.14,2641.76)
PB13: J1.39 U2.34 | length 2616.5
  Component Side w10: v1(4055,2460) 4055,2092 4348,1799 4529.9,1799 J1.39 ; U2.34 4862.95,2779 4863.95,2780 4911,2780 4914,2783 v1(4914,2933)
  Solder Side w10: v1(4055,2460) 4055,2878 4124,2947 4511,2947 4523,2959 4649,2959 4675,2933 v1(4914,2933)
PB14: R2.1 U2.35 | length 119.7
  Component Side w10: U2.35 4843.27,2818 4844.4,2819.13 R2.1
PB15: R4.1 U2.36 | length 98.4
  Component Side w10: R4.1 4800,2793.95 4823.58,2770.37 U2.36
PC0: J1.40 U2.8 | length 495.4
  Component Side w10: U2.8 4725.16,2243.84 4745,2224 4745,2108.78 v1(4779.5,2074.28)
  Solder Side w10: J1.40 4686.22,1981 v1(4779.5,2074.28)
PC1: J1.41 U2.9 | length 1348.6
  Component Side w10: v1(4741,2337) 4744.84,2333.16 U2.9 ; J1.41 4842.54,1799 5142,1799 5175,1832 v1(5175,1990) ; v1(4946,2120) 4946,2082.5 4978,2050.5 4978,2025 4991,2012 5095,2012 v1(5117,1990)
  Solder Side w10: v1(4741,2337) 4741,2185.5 4762.5,2164 4841,2164 4900,2105 4931,2105 v1(4946,2120) ; v1(5117,1990) v1(5175,1990)
PC2: J1.42 U2.10 | length 681.7
  Component Side w10: v1(4764.53,2240) U2.10 ; v1(4813,2035) 4815,2033 4909,2033 4916,2040 v1(4916,2128)
  Solder Side w10: v1(4764.53,2240) 4824.53,2180 4864,2180 v1(4916,2128) ; v1(4813,2035) 4789,2011 4789,1936.07 4838.07,1887 4854.54,1887 J1.42
PC3: J1.43 U2.11 | length 1630.5
  Component Side w10: v1(4743,2492) 4743,2384.5 4780,2347.5 4780,2327.21 4784.21,2323 U2.11
  Solder Side w10: v1(4743,2492) 4852,2492 4870,2474 4947,2474 4977,2504 5025,2504 5028,2501 5028,2155 5095,2088 5095,2046.09 5112.09,2029 5174.5,2029 5206,2060.5 5218,2060.5 5236.5,2042 5236.5,2007.5 5196,1967 5103.5,1967 5068.18,2002.32 5003.82,2002.32 4986.22,1984.72 J1.43
PC4: J1.22 U2.24 | length 648
  Component Side w10: v1(4908,2497) 4911.16,2500.16 U2.24
  Solder Side w10: v1(4908,2497) 4943.7,2497 4966.7,2520 5085,2520 5113,2492 5113,2328.54 J1.22
PC5: J1.23 U2.25 | length 673.9
  Component Side w10: v1(4875,2549) 4887.5,2549 4916.66,2519.84 U2.25 ; v1(5196.5,2483.93) 5196.5,2345.04 J1.23
  Solder Side w10: v1(4875,2549) 4929.27,2549 4932.27,2552 5128.43,2552 v1(5196.5,2483.93)
PC6: J1.45 U2.37 | length 1249.3
  Component Side w10: U2.37 4803.9,2697.1 4812.14,2688.86 4812.14,2648.87 4790,2626.73 4790,2434.5 4884,2340.5 4943.5,2340.5 5040,2244 5040,2147 5041,2146 5183.23,2146 5187,2142.23 5187,2013.5 5204.5,1996 5226.9,1996 J1.45
PC7: J1.46 U2.38 | length 1525.2
  Component Side w10: U2.38 4784.21,2677.79 v1(4788,2674)
  Solder Side w10: v1(4788,2674) 4826.76,2712.76 5029.66,2712.76 5044.75,2697.67 5170.32,2697.67 5202.65,2730 5277.37,2730 5308.22,2760.85 5308.22,2797.78 5305,2801 5305,2867 5325,2887 5400,2887 5418,2869 5418,2287.1 J1.46
PC8: J1.47 U2.39 | length 1456.4
  Component Side w10: U2.39 v1(4764.53,2778) ; v1(5031,2787.5) 5031,2904 5050,2923 5162.5,2923 5205.22,2880.28 5205.22,2525 5196.66,2516.44 5171.44,2516.44 5165,2510 5165,2452 v1(5136,2423)
  Solder Side w10: v1(4764.53,2778) 4930,2778 4951,2757 5000.5,2757 v1(5031,2787.5) ; v1(5136,2423) 5136,2354 5159.68,2330.32 J1.47
PC9: J1.48 U2.40 | length 879.1
  Component Side w10: U2.40 4744.84,2676 4774,2646.84 4774,2531.5 v1(4762,2519.5)
  Solder Side w10: v1(4762,2519.5) 4763.5,2518 4882.49,2518 4894.79,2530.3 4945.27,2530.3 4950.97,2536 5108.76,2536 5214.45,2430.32 J1.48
PC10: J1.49 U2.51 | length 1014
  Component Side w10: U2.51 4544.73,2618.27 4548,2615 4584,2615 4595,2626 4620,2626 v1(4683,2563)
  Solder Side w10: v1(4683,2563) 4693.98,2563 4705.5,2574.52 4760.78,2574.52 4775.54,2589.29 4838.1,2589.29 4861.31,2612.5 4861.31,2642.68 4883.39,2664.76 4965.66,2664.76 5032.66,2597.76 5200,2597.76 5214,2583.76 5214,2550 5231,2533 5258,2533 5260.68,2530.32 J1.49
PC11: J1.50 U2.52 | length 1485.8
  Component Side w10: U2.52 v1(4605.58,2598.58) ; v1(4912,2754) 4945,2787 4945,2926.5 4962.5,2944 5364,2944 5421,2887 5421,2690.1 J1.50
  Solder Side w10: v1(4605.58,2598.58) 4613.52,2606.52 4699.52,2606.52 4749,2656 4749,2740.5 4762.5,2754 v1(4912,2754)
PC12: J1.51 U2.53 | length 1325.4
  Component Side w10: v1(4450,2741.5) 4471,2720.5 4471,2579.9 4472,2578.9 U2.53 ; v1(5058,2812) 5131,2739 5144,2739 5158,2725 v1(5158,2647.82)
  Solder Side w10: v1(4450,2741.5) 4520.5,2812 v1(5058,2812) ; v1(5158,2647.82) 5212.46,2647.82 5229.05,2631.23 5278.6,2631.23 5309,2661.63 5309,2678.1 J1.51
PC13: J1.44 R7.2 U2.2 | length 1769.2
  Component Side w10: v1(4591,2178) 4591,2225 4607.05,2241.05 U2.2 ; J1.44 5148.57,1917.67 5148.57,2018.54 5171,2040.97 5171,2091 5145.67,2091 R7.2
  Solder Side w10: v1(4591,2178) 4596,2173 4596,2133.71 4472.29,2010 4348,2010 4330,1992 4330,1812.5 4343.5,1799 5029.9,1799 J1.44
PD2: J1.52 U2.54 | length 1257.2
  Component Side w10: v1(4433.5,2713.23) 4436.79,2559.21 U2.54 ; v1(5235.71,2841) 5239.71,2837 5354.54,2837 J1.52
  Solder Side w10: v1(4433.5,2713.23) 4426.82,2719.91 4426.82,2766.03 4501.79,2841 v1(5235.71,2841)
USBDM: R1.2 R2.2 U1.2 | length 475.5
  Component Side w10: U1.2 4541.34,2987.5 4553.87,2974.97 4684.53,2974.97 4725,2934.5 4725,2924 ; R1.2 4725,2924 ; R2.2 4875,2924 4874,2925 4726,2925 4725,2924
USBDP: R3.2 R4.2 U1.3 | length 472.5
  Component Side w10: U1.3 4515.75,2976 4532.78,2958.97 4637.5,2958.97 4650,2946.47 R3.2 4650,2859 4654,2855 4799,2855 4800,2856 R4.2
VBAT: C11.1 D1.2 U2.1 | length 433.9
  Component Side w10: v1(4295.88,2126) 4296.34,2125.54 C11.1 ; v1(4437.99,2174) D1.2 4472,2226.38 4535.62,2290 4587.36,2290 U2.1
  Solder Side w10: v1(4295.88,2126) 4389.99,2126 v1(4437.99,2174)
pads on no net: J1.4 U1.0 U1.6 U1.7

## Polygon pours and split planes (outlines as drawn)
GND on Ground Plane (split plane): 6979.9,1020.1 1020.1,1020.1 1020.1,4979.9 6979.9,4979.9
3.3V on Power Plane (split plane): 6979.9,1020.1 1020.1,1020.1 1020.1,4979.9 6979.9,4979.9

## Silkscreen, mask and mechanical layers (free items; w line width, h text height)
Top Overlay:
  lines w3: 4328.74,2074.8 4330.71,2074.8 ; 4335.63,1903.14 cw(c4338.99,1903.14) 4336.61,1905.51 ; 4435.04,1955.32 4436.22,1955.32 ; 4330.71,2074.8 4330.71,2074.8
  lines w8: 4210,2510 5260,2510 ; 4735,1985 4735,3035
Mechanical 15:
  lines w8: 2230,1985 2980,1985

## Text inside footprints (layer, text, board x,y; h text height)
J1: Bottom Overlay "AREF" at 4780.79,2895.16 h31.5; Bottom Overlay "5V" at 4860.79,2895.16 h31.5; Bottom Overlay "3V3" at 4970.79,2895.16 h31.5; Bottom Overlay "GND" at 5075.79,2895.16 h31.5; Bottom Overlay "RST" at 5195.2,2755.39 h39.37; Bottom Overlay "A5" at 5195.2,2654.56 h39.37; Bottom Overlay "A4" at 5195.2,2553.73 h39.37; Bottom Overlay "A3" at 5195.2,2452.89 h39.37; Bottom Overlay "A2" at 5195.2,2352.06 h39.37; Bottom Overlay "A1" at 5195.2,2251.23 h39.37; Bottom Overlay "A0" at 5195.2,2150.39 h39.37; Bottom Overlay "D13" at 5075.2,2018.27 h31.5; Bottom Overlay "D12" at 4976.2,2018.27 h31.5; Bottom Overlay "D11" at 4866.7,2018.27 h31.5; Bottom Overlay "D10" at 4778.19,2018.27 h31.5; Bottom Overlay "D9" at 4668.2,2020.39 h39.37; Bottom Overlay "D8" at 4569.2,2020.39 h39.37; Bottom Overlay "D7" at 4470.2,2020.39 h39.37; Bottom Overlay "D6" at 4345.2,2155.39 h39.37; Bottom Overlay "D5" at 4345.2,2255.39 h39.37; Bottom Overlay "D4" at 4345.2,2355.39 h39.37; Bottom Overlay "D3" at 4345.2,2455.39 h39.37; Bottom Overlay "D2" at 4345.2,2555.39 h39.37; Bottom Overlay "D1" at 4345.2,2655.39 h39.37; Bottom Overlay "D0" at 4345.2,2755.39 h39.37; Solder Side "MAGI" at 5341.22,1885.32 h31.5